# EAGLE board 電源基盤 (EAGLE 9.6.2)
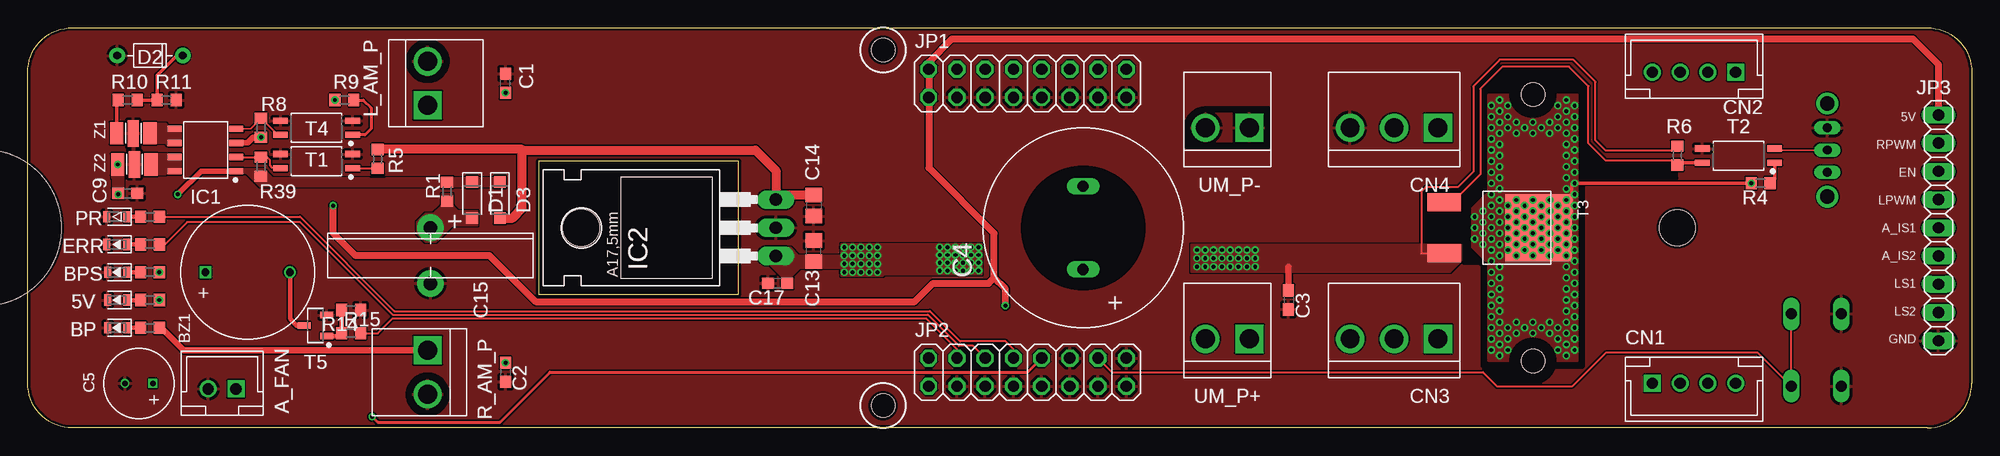
[diagram p0: board, top side]
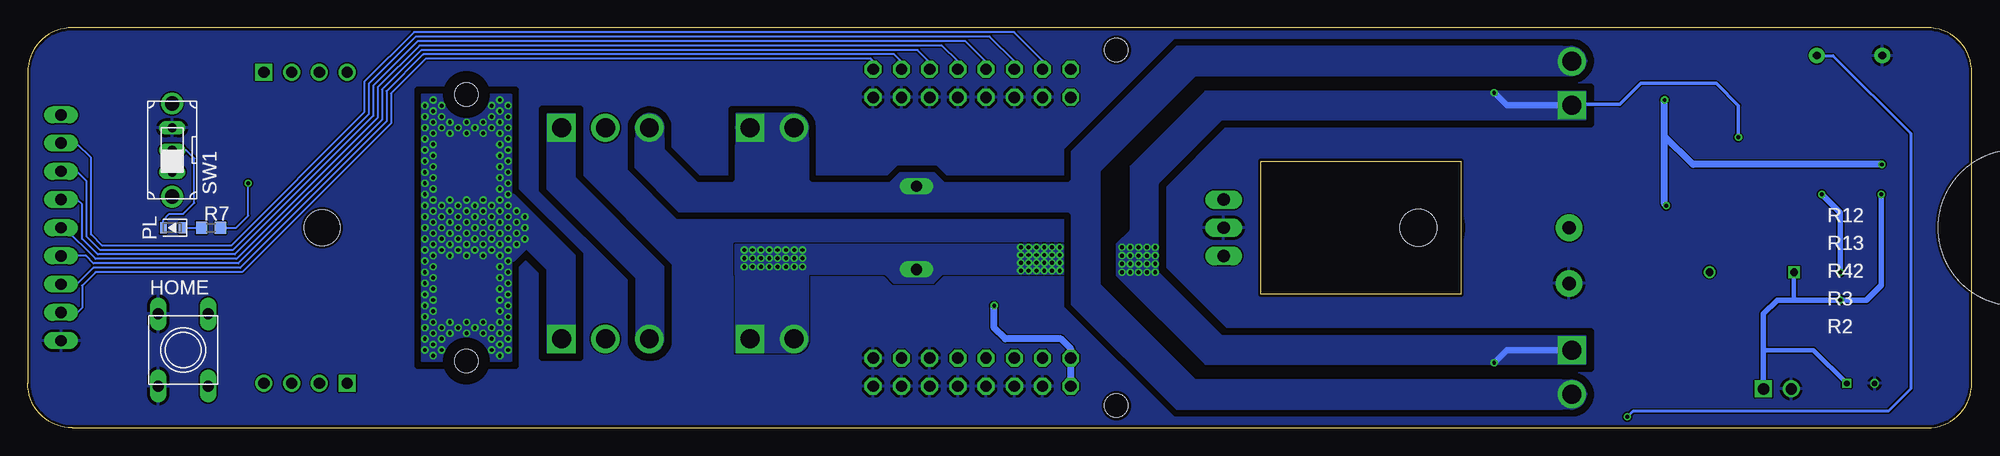
[diagram p1: board, bottom side, seen from below]

Size 175 x 36 mm. Coordinates in mm from the lower left corner, seen from the top.
Outline: 0,4 0,32 arc-90 4,36 171,36 arc-90 175,32 175,4 arc-90 171,0 4,0 arc-90 0,4
Outline: 46,12 64,12 64,24 46,24 46,12
Copper layers (1*16): Top 0.035mm / dielectric 1.6mm / Bottom 0.035mm
Design rules "JLPCB_2layer": minimum track width 5mil, minimum drill 0.2mm, track to track 5mil, track to pad 5mil, pad to pad 5mil, via to via 5mil, smd to smd 0mil, copper to edge 0.25mm, drill to drill 0.25mm, minimum pad ring 6mil, minimum via ring 6mil, stop-mask expansion 0mil, vias tented up to drill 0.6mm, thermal gap 10mil
Net classes: 1 power: clearance 0.381 mm
Holes 2.1 mm at 135.5,30 135.5,6 77,34 77,2
Holes 14 mm at -4,18
Holes 3.2 mm at 148.5,18
tRestrict: area 133.5,28 to 137.5,32; area 133.5,4 to 137.5,8; area 89.5,12.5 to 100.5,23.5; 31 lines
bRestrict: area 133.5,28 to 137.5,32; area 133.5,4 to 137.5,8; 67 lines

## Footprints (pad centres in the part's own frame; a part is rotated, then mirrored left to right if it is on the bottom)
LEDC1608X39N_B = smd 0.6 x 1: 1 -0.9,0; 2 0.8,0
B2B-XH-A = drill 1.016 square: 1 -1.25,0 | drill 1.016: 2 1.25,0
UGCM1205XP = drill 0.7 square: + -3.8,0 | drill 0.7: - 3.8,0
C0603 = smd 1.1 x 1: 1 -0.85,0; 2 0.85,0
D18_L25_P7.5_D1 = drill 1 long: + -3.75,0; - 3.75,0
CPOL6.3-7_2.5 = drill 0.5 square: + -1.25,0 | drill 0.5: - 1.25,0
C0805 = smd 1.3 x 1.5: 1 -0.95,0; 2 0.95,0
SE-5R5-D105VYV = drill 1.2 pad 2.4: + -2.5,0; - 2.5,0
B4B-XH-A = drill 1.016 square: 1 -3.75,0 | drill 1.016: 2 -1.25,0; 3 1.25,0; 4 3.75,0
B3P-VH = drill 1.7 square: 1 -3.96,0 | drill 1.7: 2 0,0; 3 3.96,0
SOD-123 = smd 1.062 x 1.072: 1 -1.625,0; 2 1.625,0
DIOAD590W50L290D210B = drill 0.7 pad 1.4: 1 -2.95,0; 2 2.95,0
LEDC1608X39N_R = smd 0.6 x 1: 1 -0.9,0; 2 0.9,0
TS-0606-F-N = drill 1 long: T1 -3.25,2.25; T2 3.25,2.25; T3 -3.25,-2.25; T4 3.25,-2.25
SOIC127P600X250-8N = smd 1.261 x 0.552: 1 -2.776,1.905; 2 -2.776,0.635; 3 -2.776,-0.635; 4 -2.776,-1.905; 5 2.776,-1.905; 6 2.776,-0.635; 7 2.776,0.635; 8 2.776,1.905
TO220 = drill 1.118 long: 1 -2.54,-6.35; 2 0,-6.35; 3 2.54,-6.35 | hole 3.302: 0,11.176
2X08 = drill 1.016 octagon: 1 -8.89,-1.27; 2 -8.89,1.27; 3 -6.35,-1.27; 4 -6.35,1.27; 5 -3.81,-1.27; 6 -3.81,1.27; 7 -1.27,-1.27; 8 -1.27,1.27; 9 1.27,-1.27; 10 1.27,1.27; 11 3.81,-1.27; 12 3.81,1.27; 13 6.35,-1.27; 14 6.35,1.27; 15 8.89,-1.27; 16 8.89,1.27
1X09 = drill 1.016 long: 1 -10.16,0; 2 -7.62,0; 3 -5.08,0; 4 -2.54,0; 5 0,0; 6 2.54,0; 7 5.08,0; 8 7.62,0; 9 10.16,0
B2P-VH = drill 1.7 square: 1 -1.98,0 | drill 1.7: 2 1.98,0
LEDC1608X39N_G = smd 0.6 x 1: A -0.9,0; K 0.9,0
R0603 = smd 1 x 1.1: 1 -0.85,0; 2 0.85,0
SS-12D01-VG4 = drill 0.8 long: COM 0,0; NC -2,0; NO 2,0 | drill 1.3: P$4 -4.2,0; P$5 4.2,0
SOIC127P700X210-4N = smd 1.312 x 0.552: 1 -3.25,0.635; 2 -3.25,-0.635; 3 3.25,-0.635; 4 3.25,0.635
DPACK = smd 1.6 x 3: 1 -2.3,-3.5; 3 2.3,-3.5 | smd 6 x 6: 2 0,5
SOT95P240X110-3N = smd 1.18 x 0.609: 1 -1.024,0.95; 2 -1.024,-0.95; 3 1.024,0
NFE31 = smd 1.2 x 2: 1 -1.5,0; 3 1.5,0 | smd 1 x 2.4: 2 0,0

## Placement (x,y rotation side)
5V  OSBL1608C1A  [LEDC1608X39N_B]  8,11.5 180 top
A_FAN  [B2B-XH-A]  17.5,3.5 180 top
BP  OSBL1608C1A  [LEDC1608X39N_B]  8,9 180 top
BPS  OSBL1608C1A  [LEDC1608X39N_B]  8,14 180 top
BZ1  UGCM1205XP  [UGCM1205XP]  19.8,14 0 top
C1  0.1u  [C0603]  43,31 90 top
C2  0.1u  [C0603]  43,5 270 top
C3  0.1u  [C0603]  113.5,11.5 270 top
C4  3300u  [D18_L25_P7.5_D1]  95,18 90 top
C5  100u  [CPOL6.3-7_2.5]  10,4 180 top
C9  0.1u  [C0603]  9,21.1 0 top
C13  10u  [C0805]  70.75,15.9 90 top
C14  10u  [C0805]  70.75,20 270 top
C15  SE-5R5-D105VYV  [SE-5R5-D105VYV]  36.25,15.5 270 top
C17  0.1u  [C0603]  67.5,13 180 top
CN1  [B4B-XH-A]  150,4 0 top
CN2  [B4B-XH-A]  150,32 180 top
CN3  [B3P-VH]  123,8 180 top
CN4  [B3P-VH]  123,27 180 top
D1  SS2040FL  [SOD-123]  40,20.5 270 top
D2  GDZJ5.1ADO-34  [DIOAD590W50L290D210B]  11,33.5 180 top
D3  SS2040FL  [SOD-123]  42.5,20.5 270 top
ERR  OSHR1608C1A  [LEDC1608X39N_R]  8,16.5 180 top
HOME  TS-0606-F-N-BLK  [TS-0606-F-N]  161,7 270 bottom
IC1  FDS4935A  [SOIC127P600X250-8N]  16,25 180 top
IC2  NJM7805FA-I  [TO220]  61,18 90 top
JP1  [2X08]  90,31 0 top
JP2  [2X08]  90,5 0 top
JP3  [1X09]  172,18 270 top
L_AM_P  [B2P-VH]  36,31 90 top
PL  OSBL1608C1A  [LEDC1608X39N_B]  162,18 180 bottom
PR  OSTG1608C1A  [LEDC1608X39N_G]  8,19 180 top
R1  10  [R0603]  37.75,21.25 90 top
R2  1k  [R0603]  11,9 0 top
R3  1k  [R0603]  11,11.5 0 top
R4  480  [R0603]  156,22 180 top
R5  100  [R0603]  31.5,24.2 270 top
R6  10k  [R0603]  148.5,24.5 270 top
R7  1k  [R0603]  158.5,18 0 bottom
R8  10k  [R0603]  21,27 270 top
R9  100  [R0603]  28.5,29.5 180 top
R10  4.7k  [R0603]  9,29.5 180 top
R11  1k  [R0603]  12.5,29.5 180 top
R12  1k  [R0603]  11,19 0 top
R13  1k  [R0603]  11,16.5 0 top
R14  1k  [R0603]  29.1,10.6 180 top
R15  10  [R0603]  29.1,8.5 0 top
R39  10k  [R0603]  21,23.5 270 top
R42  1k  [R0603]  11,14 0 top
R_AM_P  [B2P-VH]  36,5 270 top
SW1  SS-12D01-VG4  [SS-12D01-VG4]  162,25 90 bottom
T1  TLP291  [SOIC127P700X210-4N]  26,24 180 top
T2  TLP291  [SOIC127P700X210-4N]  154,24.5 180 top
T3  TJ60S04M3L  [DPACK]  131,18 270 top
T4  TLP291  [SOIC127P700X210-4N]  26,27 180 top
T5  IRLML6344TRPBF  [SOT95P240X110-3N]  25.9,9.2 180 top
UM_P+  [B2P-VH]  108,8 180 top
UM_P-  [B2P-VH]  108,27 180 top
Z1  NFE31PT  [NFE31]  9.5,26.5 180 top
Z2  NFE31PT  [NFE31]  9.6,23.7 180 top

## Library data of the parts
5V BP BPS ERR PL PR = LED
A_FAN CN1 CN2 = jst-xh
BZ1 = UGCM1205XP
C1-C3 C9 C13 C14 C17 = rcl; SPICEPREFIX: C
C4 = 小形アルミニウム電解コンデンサ_WXAシリーズ
C5 = 小形アルミニウム電解コンデンサ_MH7シリーズ
C15 = スーパーキャパシタ
CN3 CN4 L_AM_P R_AM_P UM_P+ UM_P- = jst-vh
D1 D3 = PI_ダイオード
D2 = ダイオード
HOME = タクトスイッチ
IC1 T5 = FET
IC2 = 正三端子レギュレータ
JP1-JP3 = pinhead
R1-R15 R39 R42 = rcl; SPICEPREFIX: R
SW1 = スライドスイッチ
T1 T2 T4 = フォトカプラ
T3 = 東芝_PchMOSFET
Z1 Z2 = EMIフィルタ

## Nets
5V1 [power]: IC1.7 IC1.8 Z2.1
+5V: A_FAN.1 BZ1.+ C5.+ C9.1 JP1.1 JP1.2 JP2.1 JP2.2 JP3.1 R3.2 R9.2 Z2.3
+18V [power]: CN3.1 R4.2 R7.2 T3.2
A_IS1: JP1.10 JP3.5
A_IS2: JP1.12 JP3.6
BLINE2 [power]: CN3.3 CN4.1
BPS_LINE [power]: D1.1 D3.1 IC1.1 R1.2 R39.2 R42.2
BPS_OR [power]: C15.+ D1.2 R1.1
BUZ: JP2.4 R15.2
EN: JP1.6 JP3.3
ERR_LED: JP2.6 R13.2
GND: 5V.2 A_FAN.2 BP.2 BPS.2 C1.2 C2.2 C3.2 C4.- C5.- C9.2 C13.2 C14.2 C15.- C17.2 CN4.3 D2.2 ERR.2 HOME.T3 HOME.T4 IC2.2 JP1.3 JP1.5 JP1.7 JP1.9 JP1.11 JP1.13 JP1.15 JP2.3 JP2.5 JP2.7 JP2.9 JP2.11 JP2.12 JP2.13 JP2.15 JP2.16 JP3.9 L_AM_P.2 PR.K R11.1 R14.1 R_AM_P.2 SW1.NO T1.2 T1.3 T2.3 T4.2 T4.3 T5.2 UM_P-.1 UM_P-.2 Z1.2 Z2.2
HOME_SW: HOME.T1 HOME.T2 JP2.14
LPWM: JP1.8 JP3.4
LS1: JP1.14 JP3.7
LS2: JP1.16 JP3.8
N$1: PL.1 R7.1
N$2: BP.1 R2.1
N$3: 5V.1 R3.1
N$4: IC1.5 IC1.6 Z1.1
N$5 [power]: C14.1 D3.2 IC2.3 R5.1
N$6: R4.1 T2.1
N$7: PL.2 SW1.COM T2.2
N$8: R6.2 T2.4 T3.1
N$9: IC1.4 R8.1 T4.4
N$10: PR.A R12.1
N$11: R9.1 T4.1
N$12: R10.2 Z1.3
N$13: IC1.2 R39.1 T1.4
N$14: ERR.1 R13.1
N$15: BZ1.- T5.3
N$16: R14.2 R15.1 T5.1
N$17: R5.2 T1.1
N$47: BPS.1 R42.1
PR_LED: JP2.8 R12.2
PW_AD: D2.1 JP2.10 R10.1 R11.2
RPWM: JP1.4 JP3.2
VDD [power]: C1.1 C2.1 C3.1 C4.+ C13.1 C17.1 IC1.3 IC2.1 L_AM_P.1 R2.2 R6.1 R8.2 R_AM_P.1 T3.3 UM_P+.1 UM_P+.2

## Tracks (layer width: path | path; a pad name or v marks a point on that pad's centre or on a via)
5V1
  pour Top (no thermals): 10.6,22.8 12.4,22.8 12.5,22.9 13.8,22.9 13.8,24.6 10.6,24.6
+5V  (via drill 0.35)
  Top 0.61: v27.5,20 27.5,17.5 29.5,15.5 41.56,15.5 45.71,11.35 79.85,11.35 81.5,13 86.5,13 87,13.5 | 87,13.5 87,17.5 81.11,23.39 JP1.1 JP1.2 81.11,32.91 83.2,35 169.7,35 172,32.7 JP3.1 | v88,11 88,12.5 87,13.5
  Bottom 0.254: 27.65,26.25 R9.2
  Bottom 0.406: C5.+ 14.25,7 18.75,7 | 16,11.5 BZ1.+
  Bottom 0.508: A_FAN.1 18.75,7 18.75,10.25 17.5,11.5 16,11.5 R3.2 9.5,11.5 8.15,12.85 v8.15,21
  Bottom 0.61: Z2.3 25.1,23.7 27.65,26.25 | v27.5,20 27.65,20.15 R9.2 | JP2.1 JP2.2 81.11,7.11 82,8 87,8 88,9 v88,11
  other vias: 11.85,11.5 8.1,23.7 27.65,29.5
  pour Top (no thermals): 7.6,24.6 8.6,24.6 8.6,20.6 7.7,20.6 7.7,22.4 7.6,22.5
+18V  (via drill 0.35)
  Top 0.305: R4.2 139,22 139,19 v138.5,18.5
  Bottom 0.2: R7.2 156.25,18 155.15,19.1 R4.2
  other vias: 138.5,20.5 137.75,20 138.5,19.5 137.75,19 137.75,18 138.5,17.5 137.75,17 138.5,16.5 137.75,16 138.5,15.5 137,15.5 137,16.5 137,17.5 137,18.5 137,19.5 137,20.5 136.25,20 136.25,19 136.25,18 136.25,17 136.25,16 135.5,15.5 135.5,16.5 135.5,17.5 135.5,18.5 135.5,19.5 135.5,20.5 134.75,20 134.75,19 134.75,18 134.75,17 134.75,16 134,15.5 134,16.5 134,17.5 134,18.5 134,19.5 134,20.5 133.25,20 133.25,19 133.25,18 133.25,17 133.25,16 132.5,20.5 132.5,19.5 132.5,18.5 132.5,17.5 132.5,16.5 132.5,15.5 131.75,16 131.75,17 131.75,18 131.75,19 131.75,20 131,19.5 131,18.5 131,17.5 131,16.5 130.25,17 130.25,18 130.25,19 139.25,20 139.25,19 139.25,18 139.25,17 139.25,16 139.25,15 139.25,14 139.25,13 138.5,14.5 138.5,13.5 139.25,12 138.5,12.5 138.5,11.5 139.25,11 138.5,10.5 139.25,10 138.5,9.5 139.25,9 138.5,8.5 139.25,8 138.5,7.5 139.25,7 138.5,6.5 137.75,7 137.75,8 137.75,9 137,8.5 137,9.5 136.25,9 135.5,9.5 134.75,9 135.5,8.5 134,9.5 134,8.5 133.25,9 132.5,8.5 132.5,9.5 131.75,9 131.75,8 133.25,8 132.5,7.5 133.25,7 131.75,7 132.5,6.5 131.75,10 132.5,10.5 131.75,11 132.5,11.5 131.75,12 132.5,12.5 131.75,13 132.5,13.5 131.75,14 132.5,14.5 131.75,15 131.75,21 131.75,22 131.75,23 132.5,21.5 132.5,22.5 131.75,24 132.5,23.5 132.5,24.5 131.75,25 132.5,25.5 131.75,26 132.5,26.5 131.75,27 132.5,27.5 131.75,28 132.5,28.5 131.75,29 132.5,29.5 133.25,29 133.25,28 133.25,27 134,27.5 134,26.5 134.75,27 135.5,26.5 136.25,27 135.5,27.5 137,26.5 137,27.5 137.75,27 138.5,27.5 138.5,26.5 139.25,27 139.25,28 137.75,28 138.5,28.5 137.75,29 139.25,29 138.5,29.5 139.25,26 138.5,25.5 139.25,25 138.5,24.5 139.25,24 138.5,23.5 139.25,23 138.5,22.5 139.25,22 138.5,21.5 139.25,21 155.15,22
  pour Bottom (no thermals): 125.75,6.75 125.75,15.5 129.75,19.5 139,19.5 139,17 131,17 128.25,14.25 128.25,6.75
  pour Bottom (no thermals): 139,15 139,21 131.25,21 131.25,15
  pour Bottom (no thermals): 129.75,19.5 131.25,21 131.25,15 129.75,16.5
  pour Top (no thermals): 130,16.25 131.25,15 131.25,21 130,19.75
  pour Top (no thermals): 131.25,15 131.25,21 139,21 139,15
  pour Top (no thermals): 131.5,18 131.5,30 133.5,30 arc90 135.5,28 arc90 137.5,30 139.5,30 139.5,18
  pour Top (no thermals): 139.5,18 139.5,6 137.5,6 arc90 135.5,8 arc90 133.5,6 131.5,6 131.5,18
  pour Bottom (no thermals): 139.5,18 139.5,30 137.5,30 arc-90 135.5,28 arc-90 133.5,30 131.5,30 131.5,18
  pour Bottom (no thermals): 131.5,18 131.5,6 133.5,6 arc-90 135.5,8 arc-90 137.5,6 139.5,6 139.5,18
A_IS1
  Bottom 0.2: JP1.10 91.27,32.97 92.7,34.4 139.73,34.4 143.5,30.63 143.5,27.9 156.2,15.2 168.9,15.2 171.7,18 JP3.5
A_IS2
  Bottom 0.2: JP1.12 93.81,32.91 94.9,34 139.57,34 143.1,30.47 143.1,27.74 156.04,14.8 169.1,14.8 169.76,15.46 JP3.6
BLINE2
  pour Bottom (no thermals): 119,6.75 arc90 120.25,8 120.25,13.5 128.25,21.5 128.25,28.25 125.75,28.25 125.75,22.5 117.75,14.5 117.75,8 arc90
BPS_LINE  (via drill 0.35)
  Top 0.508: v13.5,21 15.6,23.09 IC1.1
  Bottom 0.508: R42.2 11.85,19.35 v13.5,21
  other vias: 11.85,14
  pour Top (no thermals): 42.9,21.7 20.9,21.7 19.7,22.9 18.3,22.9 18.3,23.3 21.2,23.3 22,22.5 42.9,22.5
BPS_OR
  pour Top (no thermals): 35,18.5 35,17.5 35.75,16.75 36.75,16.75 38.25,18.25 40.5,18.25 40.5,19.5 38.75,19.5 38.25,20 38.25,21 37.25,21 37.25,20 36.5,19.25 35.75,19.25
BUZ
  Top 0.2: R15.2 31.5,8.5 32.85,9.85 80.85,9.85 83.65,7.05 JP2.4
EN
  Bottom 0.2: JP1.6 86.19,32.99 88.4,35.2 140.06,35.2 144.3,30.96 144.3,28.23 156.53,16 168.5,16 169.7,17.2 169.7,22.2 170.58,23.08 JP3.3
ERR_LED
  Top 0.2: R13.2 12.35,16.5 14.35,18.5 24.5,18.5 32.83,10.17 81.03,10.17 83.83,7.37 85.09,7.37 JP2.6
GND
  pour Top (rank 2): 0,0 175,0 175,36 0,36
  pour Bottom (rank 2): 0,36 175,36 175,0 0,0
  pour Bottom (no thermals): 36,4.25 70,4.25 78.5,12.75 78.5,23.25 70,31.75 36,31.75 arc-90 34.75,33 arc-90 36,34.25 71.5,34.25 81,24.75 81,11.25 71.5,1.75 36,1.75 arc-90 34.75,3 arc-90
  pour Bottom (no thermals): 78.5,19.5 78.5,22 92.6,22 93.5,22.9 96.4,22.9 97.3,22 114.75,22 117.75,25 117.75,27 arc-90 119,28.25 arc-90 120.25,27 120.25,23.5 116.25,19.5
  pour Bottom (no thermals): 104.75,27 arc-90 106,28.25 111.25,28.25 111.25,22 104.75,22
HOME_SW
  Top 0.2: HOME.T1 HOME.T2 155.75,6.75 142.05,6.75 139,3.7 132.3,3.7 131,5 97.62,5 JP2.14
LPWM
  Bottom 0.2: JP1.8 88.73,32.93 90.6,34.8 139.9,34.8 143.9,30.8 143.9,28.07 156.37,15.6 168.7,15.6 170.1,17 170.1,20.1 170.54,20.54 JP3.4
LS1
  Bottom 0.2: JP1.14 96.35,32.95 97,33.6 139.4,33.6 142.7,30.3 142.7,27.57 155.87,14.4 169.1,14.4 170.58,12.92 JP3.7
LS2
  Bottom 0.2: JP1.16 98.89,32.99 99.1,33.2 139.2,33.2 142.3,30.1 142.3,27.4 155.7,14 168.9,14 170.1,12.8 170.1,10.8 170.52,10.38 JP3.8
N$1
  Bottom 0.2: PL.1 R7.1
N$2
  Top 0.406: BP.1 R2.1
N$3
  Top 0.406: 5V.1 R3.1
N$4
  pour Top (no thermals): 10.5,25.6 12.4,25.6 12.6,25.4 13.8,25.4 13.8,27.2 12.6,27.2 12.4,27.4 10.5,27.4
N$5
  Top 0.813: C14.1 67.35,20.95 IC2.3 67.35,23.15 65.5,25 44.5,25 | R5.1 44.5,25.05 44.5,25 | D3.2 43.62,18.88 44.5,19.75 44.5,25
N$6
  Top 0.152: 157.25,23.8 T2.1
  Top 0.305: R4.1 157.25,22.4 157.25,23.8
N$7
  Top 0.152: T2.2 157.38,25 SW1.COM
  Bottom 0.2: PL.2 162.8,18.7 162.25,19.25 161,19.25 160,20.25 160,24.25 160.75,25 SW1.COM
N$8
  Top 0.2: R6.2 148.1,24.05 142.05,24.05 140.5,25.6 140.5,30.75 138.75,32.5 132.75,32.5 130.75,30.5 130.75,22.8 128.25,20.3 T3.1
  Top 0.305: T2.4 148.72,23.87 R6.2
N$9
  Top 0.15: IC1.4 20.05,26.91 R8.1 22.48,26.37 T4.4
N$10
  Top 0.406: R12.1 PR.A
N$11
  Top 0.254: R9.1 30.2,29.5 30.9,28.8 30.9,26.9 30.36,26.37 T4.1
N$12
  Top 0.305: Z1.3 8,29.35 R10.2
N$13
  Top 0.2: 22.54,23.37 T1.4 22.07,23.37 21.8,23.63 21.8,24.1 21.55,24.35 R39.1 20.82,24.52 20.82,24.68 20.52,24.37 IC1.2
N$14
  Top 0.406: R13.1 ERR.1
N$15
  Top 0.406: T5.3 24.2,9.2 23.6,9.8 BZ1.-
N$16
  Top 0.406: T5.1 28,8.25 R15.1 R14.2
N$17
  Top 0.2: T1.1 31.5,23.37 R5.2
N$47
  Top 0.406: BPS.1 R42.1
PR_LED
  Top 0.2: R12.2 24.5,19 33,10.5 81.2,10.5 83.93,7.77 88.03,7.77 88.73,7.07 JP2.8
PW_AD  (via drill 0.35)
  Top 0.254: 91.2,6.34 JP2.10 90,5 47,5 42.5,0.5 31.5,0.5 v31,1
  Top 0.305: R10.1 R11.2 11.65,31.75 13.4,33.5 D2.1
  Bottom 0.254: D2.1 12.5,33.5 5.5,26.5 5.5,3.5 7.5,1.5 30.5,1.5 v31,1
RPWM
  Bottom 0.2: JP1.4 83.65,33.05 86.2,35.6 140.23,35.6 144.7,31.13 144.7,28.4 156.7,16.4 168.3,16.4 169.3,17.4 169.3,24.3 170.62,25.62 JP3.2
VDD  (via drill 0.35)
  Top 0.2: R6.1 148.1,24.95 142.05,24.95 141.13,25.87 141.13,31.13 139.13,33.13 132.51,33.13 130.12,30.73 130.12,23.02 128.75,21.65 125.85,21.65 125.45,21.25 125.45,15.7 T3.3
  Top 0.508: IC1.3 19.79,25.63 20.3,26.15 R8.2
  Top 0.6: C3.1 113.5,14.5 | R_AM_P.1 14.02,6.98 12,9 R2.2
  Bottom 0.305: R8.2 21,29 23,31 29.8,31 31.7,29.1 35.9,29.1 36,29
  Bottom 0.6: R_AM_P.1 41.87,6.98 42.95,5.9 43,5.9 | L_AM_P.1 41.87,29.02 42.95,30.1 43,30.1
  other vias: 73.5,16.25 73.5,15.5 73.5,14.75 73.5,14 74.25,14 74.25,14.75 74.25,15.5 74.25,16.25 75,16.25 75,15.5 75,14.75 75,14 75.75,14 75.75,14.75 75.75,15.5 75.75,16.25 76.5,16.25 76.5,15.5 76.5,14.75 76.5,14 43,5.85 43,30.15 105.25,16 105.25,15.25 105.25,14.5 106,14.5 106,15.25 106,16 106.75,16 106.75,15.25 106.75,14.5 107.5,14.5 107.5,15.25 107.5,16 108.25,16 108.25,15.25 108.25,14.5 109,14.5 109,15.25 109,16 109.75,16 109.75,15.25 109.75,14.5 110.5,14.5 110.5,15.25 110.5,16 21,26.15 82.1,16.25 82.1,15.55 82.1,14.85 82.1,14.15 82.8,14.15 82.8,14.85 82.8,15.55 82.8,16.25 83.5,16.25 83.5,15.55 83.5,14.85 83.5,14.15 84.2,14.15 84.2,14.85 84.2,15.55 84.2,16.25 84.9,16.25 84.9,15.55 84.9,14.85 84.9,14.15 85.6,14.15 85.6,14.85 85.6,15.55 85.6,16.25
  pour Top (no thermals): 73.45,15.5 69.4,15.5 68.7,16.2 66.5,16.2 arc90 65.8,15.5 arc90 66.6,14.7 66.8,14.7 67.9,13.6 67.9,12.6 68.8,12.6 68.8,13.7 69.5,14.4 73.45,14.4
  pour Bottom (no thermals): 34.75,30.25 69,30.25 75.75,23.5 75.75,17.75 77,16.5 77,13.75 69,5.75 34.75,5.75 34.75,8.25 67.5,8.25 73.25,14 73.25,22 67.5,27.75 34.75,27.75
  pour Top (no thermals): 129,16.5 129,15 128,14 104.75,14 104.75,16.5
  pour Bottom (no thermals): 104.75,8 arc90 106,6.75 111.25,6.75 111.25,16.5 104.75,16.5
  pour Bottom (no thermals): 111.3,16.5 81.8,16.5 81.8,13.8 92.7,13.8 93.5,13 97,13 97.8,13.8 111.3,13.8
  pour Top (no thermals): 85.9,16.5 73.2,16.5 73.2,13.7 77,13.7 77.1,13.8 85.9,13.8

## Text on the board
tPlace: 5V | RPWM | EN | LPWM | A_IS1 | A_IS2 | LS1 | LS2 | GND
_tPlace: C5
_bPlace: HOME
_tNames: D2 | JP1 | R10 | R11 | R9 | C1 | CN2 | JP3 | R8 | L_AM_P | R6 | T2 | Z1 | T4 | R5 | Z2 | T1 | C14 | UM_P- | CN4 | IC1 | R39 | R1 | R4 | C9 | D1 | D3 | T3 | PR | ERR | BPS | IC2 | C4 | 5V | C17 | C3 | C15 | C13 | BZ1 | R14 | BP | R15 | R_AM_P | JP2 | T5 | CN1 | C2 | UM_P+ | CN3 | A_FAN
_bNames: SW1 | R7 | R12 | PL | R13 | R42 | R3 | R2